# Altium PCB rightinferior.PcbDoc
Units mil, origin at the board's own origin, x right, y up, seen from the top; angles counter-clockwise.
Board outline 1442.13 x 984.25 mil, 2 copper layers (Top Layer, Bottom Layer), stack 30.8 mil thick; 3 components, 6 nets, 36 pads, 10 vias.
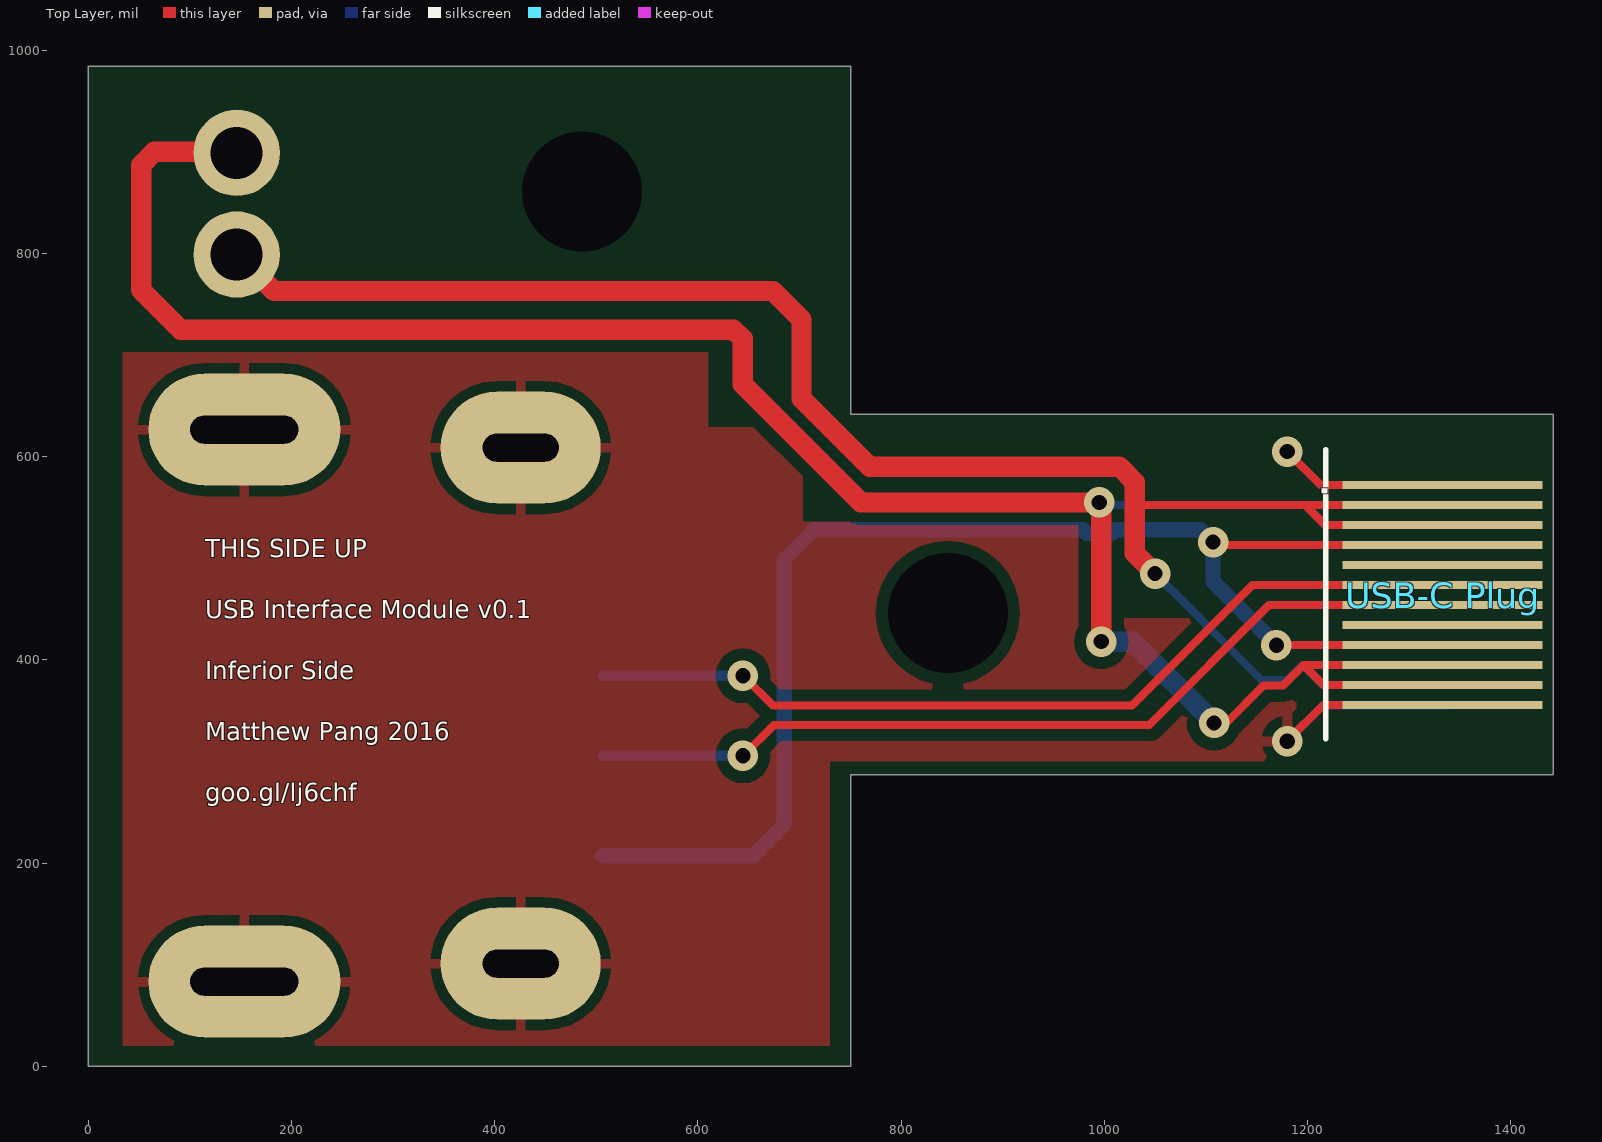
[diagram p0: Top Layer view]
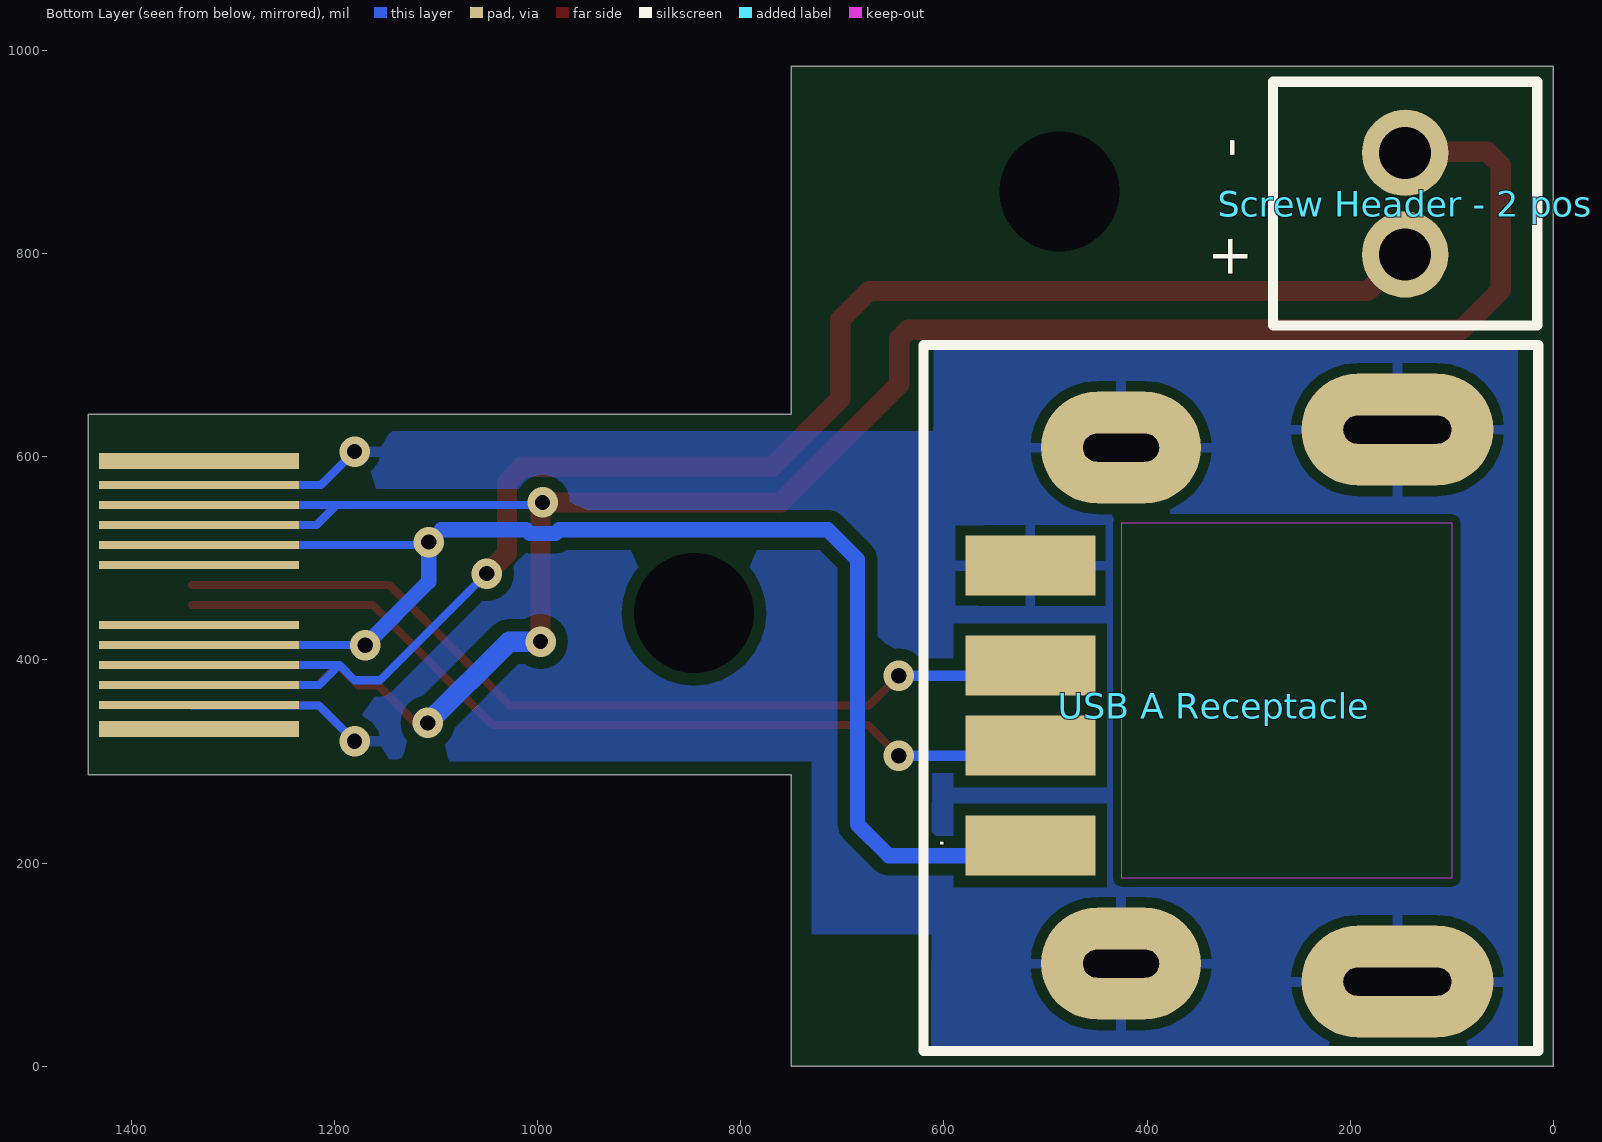
[diagram p1: Bottom Layer view, seen from below]

## Layer stack, top to bottom
Top Solder: solder mask 0.4, Solder Resist, Dk 3.5
Top Layer: signal copper 1.4
Dielectric 1: dielectric 28, FR-4, Dk 4.8
Bottom Layer: signal copper 1.4
Bottom Solder: solder mask 0.4, Solder Resist, Dk 3.5

## Board outline
0,0 0,984.25 750.39,984.25 750.39,641.73 1442.13,641.73 1442.13,287.01 750.39,287.01 750.39,0

## Design rules (kind name [scope] priority, off if disabled: settings)
BoardOutlineClearance [All] p1: gap=10
Clearance [All] p1: gap=8 except(12: Arc-Poly Track-Poly SMDPad-Poly THPad-Poly Via-Poly Fill-Poly Poly-Poly)
ComponentClearance [All] p1 off: gap=1 collisioncheckmode=3 verticalgap=1 showdistances=TRUE
DiffPairsRouting [All] p1: maxlimit=10 minlimit=10 mostfreqgap=10 toplayer_minwidth=8 toplayer_maxwidth=15 toplayer_prefwidth=8 bottomlayer_minwidth=8 bottomlayer_maxwidth=15 bottomlayer_prefwidth=8 maxuncoupledlength=500
HoleSize [All] p1: absolutevalues=TRUE maxlimit=150 minlimit=4 maxpercent=80.000 minpercent=20.000
MinimumAnnularRing [All] p1: minimumring=5
MinimumSolderMaskSliver [All] p1: minsoldermaskwidth=3
PlaneClearance [All] p1: clearance=50
PolygonConnect [All] p1: connectstyle=Relief reliefconductorwidth=10 reliefentries=4 polygonreliefangle="90 Angle" airgapwidth=10
RoutingVias [All] p1: holewidth=10 width=20 viastyle="Through Hole" minholewidth=5 minwidth=15 maxholewidth=40 maxwidth=50
SilkToSilkClearance [All] p1: silktosilkclearance=4
SilkToSolderMaskClearance [IsPad] p1: minsilkscreentomaskgap=5 clearancetoexposedcopper=TRUE
SolderMaskExpansion [All] p1: expansion=3
Width [InNetClass('All Nets')] p1: maxlimit=30 minlimit=8 preferedwidth=10 minimp=50.000000 maximp=50.000000 favimp=50.000000
23 further rules are at their usual default settings.

## Classes and differential pairs
differential pair USB_D: +USB_D_P -USB_D_N

## Components (designator, comment, footprint, x,y, rotation, side; value= is the part's Value field where it differs from the comment)
"Screw Header - 2 pos" "Screw Header - 2 pos" "SCREW HEADER - 2POS" 146,799 r90 bottom
"USB A Receptacle" "USB A Receptacle" "USB A RECEPTACLE" 515,355 r90 bottom locked
"USB-C Plug" "USB-C Plug" "USB C PLUG" 1333,572 r270 top locked

## Footprints (in the part's own frame and the unit in brackets; to place one, negate y for a bottom-side part, rotate by r counter-clockwise, add the part's x,y. Pads: shape width x height; smd on the part's side, far side on the other; paste and mask are expansions set on the pad)
"SCREW HEADER - 2POS" [mil] "On Shore Technology - OSTVN02A150"
  round 85 hole 51.18: N(100,0) P(0,0)
  silkscreen extent -70,-130 170,130
"USB A RECEPTACLE" [mm] "TE CONNECTIVITY - 1932638-3"
  rect 1.5x3.25 smd: +5VBus(-3.5,0) USBDM(-1,0) USBDP(1,0) USBGND(3.5,0)
  oval 2.8x4 hole 0.7 slot 1.9 at 90 deg: SHL_GND1(-6.45,-2.27) SHL_GND3(6.45,-2.27)
  oval 2.8x4.8 hole 0.7 slot 2.7 at 90 deg: SHL_GND2(-6.9,-9.18) SHL_GND4(6.9,-9.18)
  Top Layer keep-out region: -4.318,-2.286 4.572,-2.286 4.572,-10.414 4.572,-10.541 4.445,-10.541 -4.318,-10.541
  silkscreen extent -8.64,-12.7 9.02,2.67
"USB C PLUG" [mm] "Amphenol 12401562E4#2A"
  rect 0.2x5 smd: A1(0,0) A2(0.5,0) A3(1,0) A4(1.5,0) A5(2,0) A6(2.5,0) A7(3,0) A8(3.5,0) A9(4,0) A10(4.5,0) A11(5,0) A12(5.5,0)
  rect 0.2x5 smd far side: B1(5.5,0) B2(5,0) B3(4.5,0) B4(4,0) B5(3.5,0) B8(2,0) B9(1.5,0) B10(1,0) B11(0.5,0) B12(0,0)
  rect 0.4x5 smd far side: N/C-1(-0.6,0) N/C-2(6.1,0)
  silkscreen extent -0.89,-2.92 6.35,-2.92

## Part data
"Screw Header - 2 pos": "On Shore Technology - OSTVN02A150"
"USB A Receptacle": "TE Connectivity AMP Connectors - 1932638-3"
"USB-C Plug": "Amphenol  - 12401562E4#2A"

## Free pads (board coordinates)
  round 0 hole 118.11 unplated: 0(486,861) 1(846,446)

## Via types
v1: diameter 30, hole 15, Top Layer to Bottom Layer, 10 vias

## Nets (pads, with @x,y where several pads share a name; then routed paths per layer and width w, separated by ;. In a path a pad name is that pad's centre, name@x,y a point inside that pad or via, vN(x,y) a via of type N, cw(c..) or ccw(c..) an arc to the next point about the centre after c; other vN are vias at no path point)
12V_GND: "Screw Header - 2 pos.N" "USB-C Plug.A10" "USB-C Plug.A11" "USB-C Plug.B10" "USB-C Plug.B11" | length 2455.8
  Top Layer w8: v1(1108,338) 1120,338 1156.67,374.67 1176,374.67 1196.16,394.83 ; 1336,375.15 1215.85,375.15 1196.16,394.83 ; 1336,394.83 1196.16,394.83
  Top Layer w20: 146,900 65,900 52,887 52,764 91,725 635,725 644,716 644,671.4 760.4,555 v1(995,555) 997,553 v1(997,418)
  Bottom Layer w8: v1(995,555) 997.68,552.32 1198,552.32 ; 1340,532.63 1336,532.63 1217.68,532.63 1198,552.32 ; 1340,552.32 1336,552.32 1198,552.32
  Bottom Layer w20: v1(997,418) 1028,418 v1(1108,338)
+5V: "USB A Receptacle.+5VBus" "USB-C Plug.A4" "USB-C Plug.A9" "USB-C Plug.B4" "USB-C Plug.B9" | length 1813.2
  Top Layer w8: v1@1110.06,512.95 1340,512.95 ; v1@1176.52,414.52 1340,414.52
  Bottom Layer w8: 1095,528 1110.06,512.95 1340,512.95 ; v1@1176.52,414.52 1340,414.52
  Bottom Layer w15: 506,207.2 654.2,207.2 685,238 685,499 714,528 978.87,528 982.37,524.5 1007.63,524.5 1011.13,528 1095,528 ; v1(1107,516) 1107,477 v1(1169.48,414.52)
+12V: "Screw Header - 2 pos.P" "USB-C Plug.A2" "USB-C Plug.A3" "USB-C Plug.B2" "USB-C Plug.B3" | length 2060.4
  Top Layer w8: 1032.68,552.32 1340,552.32 ; 1200,550 1217.37,532.63 1340,532.63
  Top Layer w20: 146,800 183,763 674,763 702,735 702,657 769,590 1015,590 1030,575 1030,505 v1(1050,485)
  Bottom Layer w8: v1(1050,485) 1155,380 1180,380 1195,395 1195.16,394.83 ; 1336,375.15 1214.85,375.15 1195.16,394.83 ; 1336,394.83 1195.16,394.83
GND: "USB A Receptacle.SHL_GND1" "USB A Receptacle.SHL_GND2" "USB A Receptacle.SHL_GND3" "USB A Receptacle.SHL_GND4" "USB A Receptacle.USBGND" "USB-C Plug.A1" "USB-C Plug.A12" "USB-C Plug.B1" "USB-C Plug.B12" | length 775.3
  Top Layer w8: v1(1180,320) 1215.46,355.46 1340,355.46 ; v1(1180,605) 1213,572 1340,572
  Bottom Layer w8: v1(1180,320) 1215,355 1339.54,355 1340,355.46 ; v1(1180,605) 1213,572 1340,572
  Bottom Layer w20: 415.63,101.06 449.57,135 ; 415.63,608.94 419.57,605
  Bottom Layer w25: 398.91,73.35 416.63,91.06
USB_D_N: "USB A Receptacle.USBDM" "USB-C Plug.A7" | length 895.4
  Top Layer w8: v1(644.37,305.63) 674.74,336 1044.22,336 1162.11,453.89 1340,453.89
  Bottom Layer w10: 506,305.63 v1(644.37,305.63)
USB_D_P: "USB A Receptacle.USBDP" "USB-C Plug.A6" | length 895.3
  Top Layer w8: v1(644.37,384.37) 673.74,355 1027.22,355 1145.8,473.57 1340,473.57
  Bottom Layer w10: 506,384.37 v1(644.37,384.37)
pads on no net: "USB-C Plug.A5" "USB-C Plug.A8" "USB-C Plug.B5" "USB-C Plug.B8" "USB-C Plug.N/C-1" "USB-C Plug.N/C-2"

## Polygon pours and split planes (outlines as drawn)
GND on Bottom Layer "GND" (solid, remove dead copper, pour order 10): 35,705 45,705 325,705 610,705 612.5,17.5 607.5,17.5 612.5,22.5 607.5,17.5 597.5,17.5 35,20
GND on Bottom Layer "GND" (solid, remove dead copper, pour order 14): 550,625 1250,625 1250,300 730,300 730,145 730,130 715,130 555,130 545,130
GND on Top Layer "GND" (solid, remove dead copper, pour order 18): 1189,300 1189,441 1017,441 1017,536 703,536 703,629 610,629 610,703 304,703 293,703 34,703 34,675 34,322 34,20.39 721,20 730,20.39 730,29 730,300

## Silkscreen, mask and mechanical layers (free items; w line width, h text height)
Top Overlay:
  text "THIS SIDE UP /  / USB Interface Module v0.1 /  / Inferior Side /  / Matthew Pang 2016 /  / goo.gl/lj6chf" at 115,255 h30
Mechanical 1:
  lines w1: 0,0 0,984 750,984 750,642 1442,642 1442,287 750,287 750,0 0,0

## Text inside footprints (layer, text, board x,y; h text height)
"Screw Header - 2 pos": Bottom Overlay "+" at 301,774 h40 r270; Bottom Overlay "-" at 301,894 h40 r270